# EAGLE board untitled (EAGLE 9.6.2)
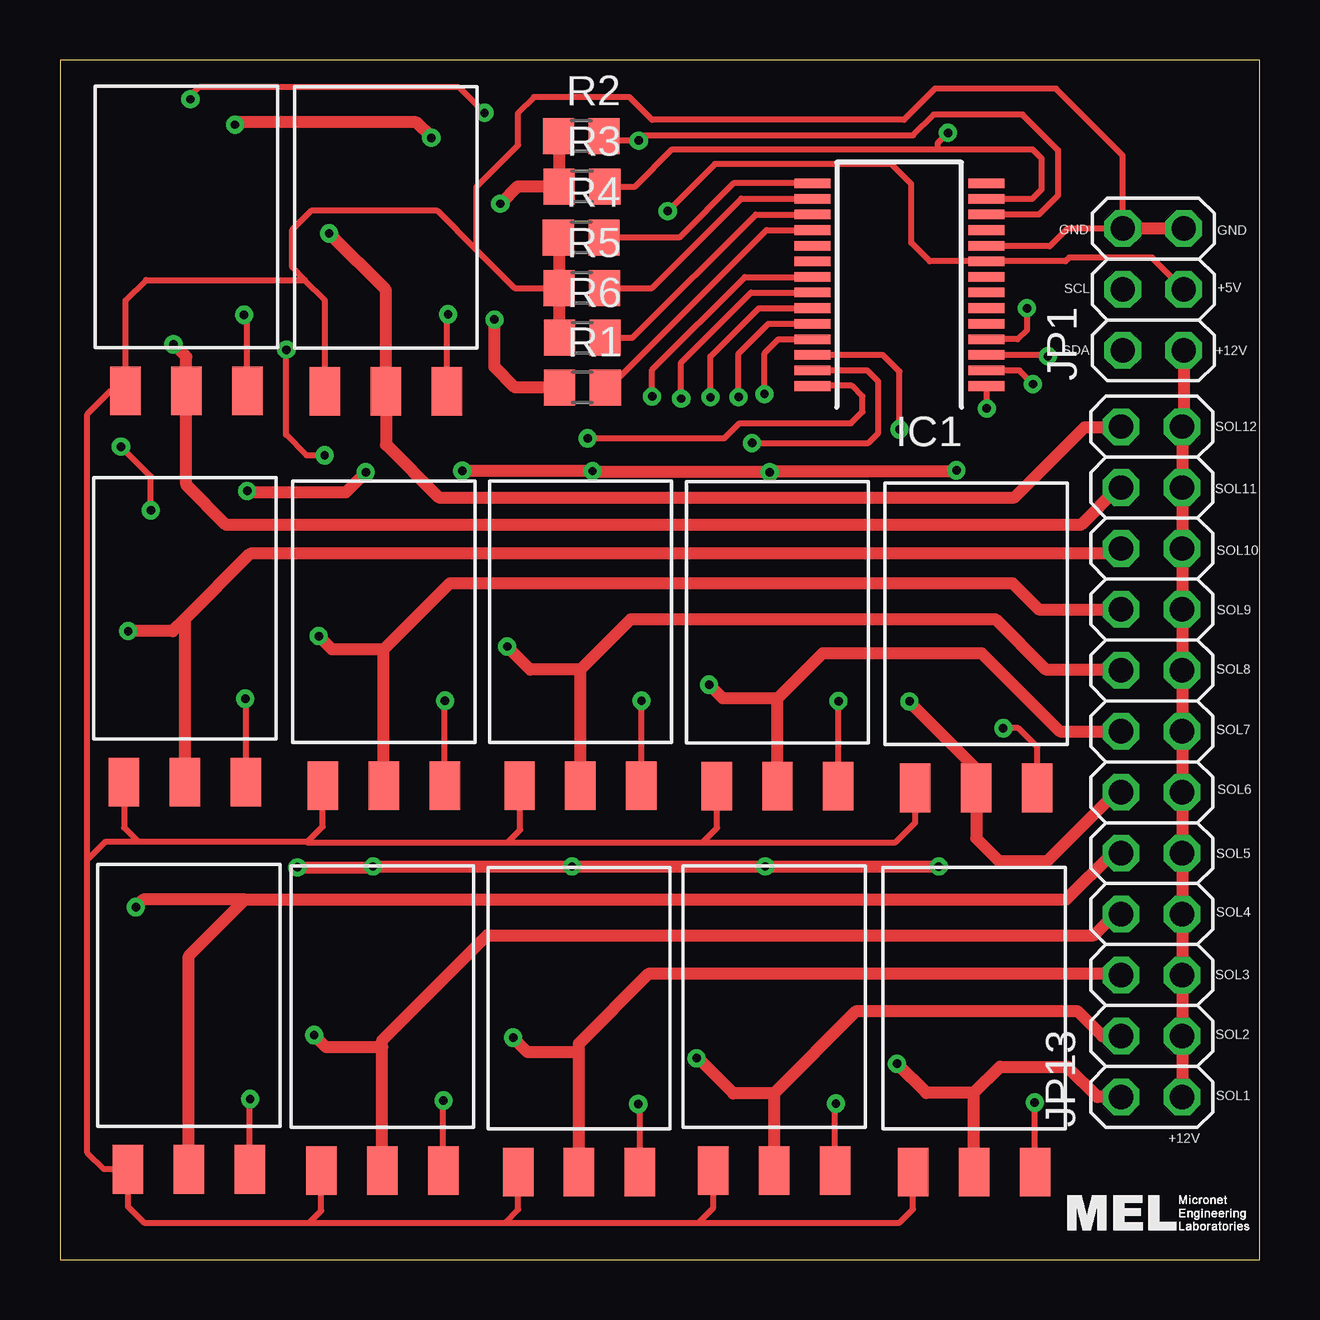
[diagram p0: board, top side]
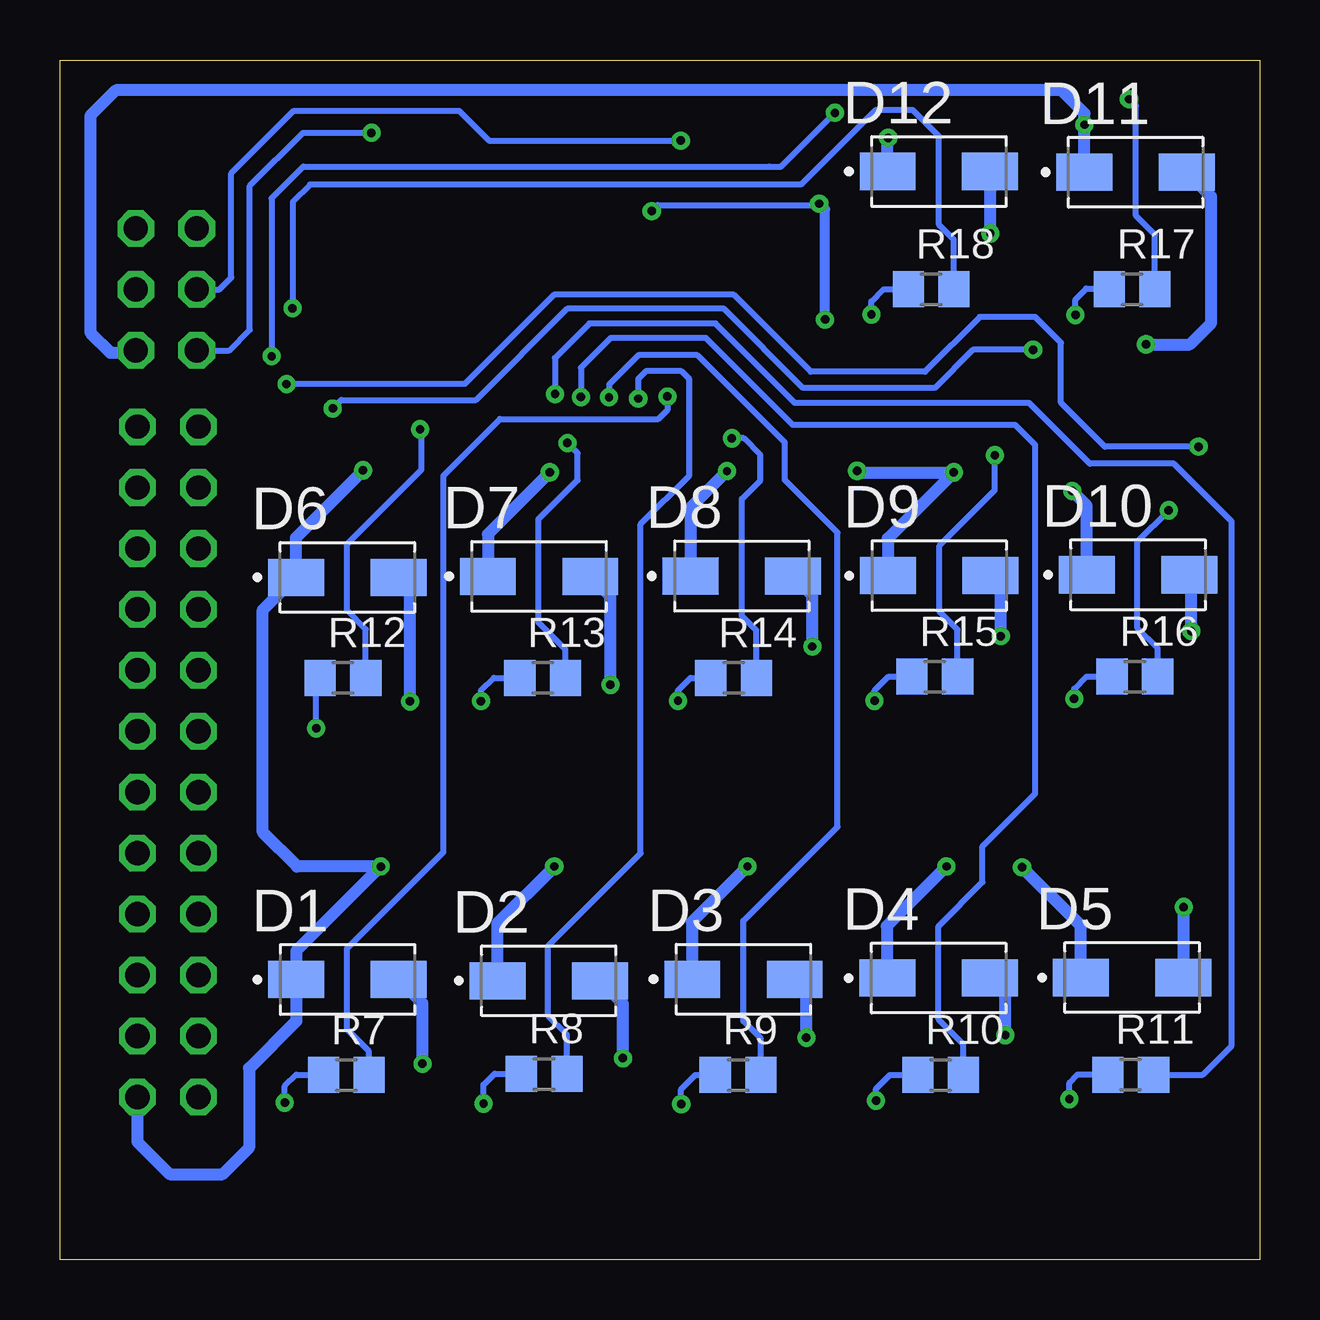
[diagram p1: board, bottom side, seen from below]

Size 50 x 50 mm. Coordinates in mm from the lower left corner, seen from the top.
Outline: 0,0 50,0 50,50 0,50 0,0
Copper layers (1*16): Top 0.035mm / dielectric 1.5mm / Bottom 0.035mm
Design rules "default": minimum track width 6mil, minimum drill 0.35mm, track to track 6mil, track to pad 6mil, pad to pad 6mil, via to via 6mil, smd to smd 6mil, copper to edge 40mil, drill to drill 6mil, minimum pad ring 10mil, minimum via ring 8mil, stop-mask expansion 4mil, vias tented up to drill 0mil, thermal gap 10mil

## Footprints (pad centres in the part's own frame; a part is rotated, then mirrored left to right if it is on the bottom)
BD677-SMD = smd 1.27 x 2.032: BASE 2.54,0; COL 0,0; EMI -2.54,0
DIOM5226X240N = smd 2.33 x 1.55: A 2.135,0; C -2.135,0
SSOP28 = smd 0.4 x 1.5: 1 -4.225,-3.625; 2 -3.575,-3.625; 3 -2.925,-3.625; 4 -2.275,-3.625; 5 -1.625,-3.625; 6 -0.975,-3.625; 7 -0.325,-3.625; 8 0.325,-3.625; 9 0.975,-3.625; 10 1.625,-3.625; 11 2.275,-3.625; 12 2.925,-3.625; 13 3.575,-3.625; 14 4.225,-3.625; 15 4.225,3.625; 16 3.575,3.625; 17 2.925,3.625; 18 2.275,3.625; 19 1.625,3.625; 20 0.975,3.625; 21 0.325,3.625; 22 -0.325,3.625; 23 -0.975,3.625; 24 -1.625,3.625; 25 -2.275,3.625; 26 -2.925,3.625; 27 -3.575,3.625; 28 -4.225,3.625
2X03 = drill 1.016 octagon: 1 -2.54,-1.27; 2 -2.54,1.27; 3 0,-1.27; 4 0,1.27; 5 2.54,-1.27; 6 2.54,1.27
2X12 = drill 1.016 octagon: 1 -13.97,-1.27; 2 -13.97,1.27; 3 -11.43,-1.27; 4 -11.43,1.27; 5 -8.89,-1.27; 6 -8.89,1.27; 7 -6.35,-1.27; 8 -6.35,1.27; 9 -3.81,-1.27; 10 -3.81,1.27; 11 -1.27,-1.27; 12 -1.27,1.27; 13 1.27,-1.27; 14 1.27,1.27; 15 3.81,-1.27; 16 3.81,1.27; 17 6.35,-1.27; 18 6.35,1.27; 19 8.89,-1.27; 20 8.89,1.27; 21 11.43,-1.27; 22 11.43,1.27; 23 13.97,-1.27; 24 13.97,1.27
R0805 = smd 1.3 x 1.5: 1 -0.95,0; 2 0.95,0

## Placement (x,y rotation side)
BD677-SMD1  [BD677-SMD]  38.1,3.64 0 top
BD677-SMD2  [BD677-SMD]  29.77,3.7 0 top
BD677-SMD3  [BD677-SMD]  21.63,3.64 0 top
BD677-SMD4  [BD677-SMD]  13.43,3.7 0 top
BD677-SMD5  [BD677-SMD]  5.37,3.76 0 top
BD677-SMD6  [BD677-SMD]  38.19,19.66 0 top
BD677-SMD7  [BD677-SMD]  29.91,19.73 0 top
BD677-SMD8  [BD677-SMD]  21.7,19.75 0 top
BD677-SMD9  [BD677-SMD]  13.5,19.75 0 top
BD677-SMD10  [BD677-SMD]  5.21,19.9 0 top
BD677-SMD11  [BD677-SMD]  5.27,36.21 0 top
BD677-SMD12  [BD677-SMD]  13.59,36.19 0 top
D1  US1M-13  [DIOM5226X240N]  38.01,11.67 0 bottom
D2  US1M-13  [DIOM5226X240N]  29.63,11.62 0 bottom
D3  US1M-13  [DIOM5226X240N]  21.51,11.68 0 bottom
D4  US1M-13  [DIOM5226X240N]  13.37,11.74 0 bottom
D5  US1M-13  [DIOM5226X240N]  5.31,11.75 0 bottom
D6  US1M-13  [DIOM5226X240N]  38.02,28.43 0 bottom
D7  US1M-13  [DIOM5226X240N]  30.03,28.47 0 bottom
D8  US1M-13  [DIOM5226X240N]  21.58,28.49 0 bottom
D9  US1M-13  [DIOM5226X240N]  13.35,28.51 0 bottom
D10  US1M-13  [DIOM5226X240N]  5.06,28.54 0 bottom
D11  US1M-13  [DIOM5226X240N]  5.16,45.32 0 bottom
D12  US1M-13  [DIOM5226X240N]  13.37,45.35 0 bottom
IC1  MCP23017SS  [SSOP28]  34.98,40.63 90 top
JP1  [2X03]  45.57,40.44 90 top
JP13  [2X12]  45.51,20.75 90 top
R1  [R0805]  21.78,36.35 0 top
R2  [R0805]  21.73,46.83 0 top
R3  [R0805]  21.76,44.72 0 top
R4  [R0805]  21.72,42.6 0 top
R5  [R0805]  21.75,40.5 0 top
R6  [R0805]  21.77,38.42 0 top
R7  [R0805]  38.06,7.69 0 bottom
R8  [R0805]  29.82,7.73 0 bottom
R9  [R0805]  21.73,7.69 0 bottom
R10  [R0805]  13.29,7.7 0 bottom
R11  [R0805]  5.37,7.71 0 bottom
R12  [R0805]  38.2,24.24 0 bottom
R13  [R0805]  29.88,24.25 0 bottom
R14  [R0805]  21.92,24.24 0 bottom
R15  [R0805]  13.54,24.29 0 bottom
R16  [R0805]  5.2,24.3 0 bottom
R17  [R0805]  5.31,40.44 0 bottom
R18  [R0805]  13.69,40.44 0 bottom

## Library data of the parts
BD677-SMD1-BD677-SMD12 = BD677-SMD
D1-D12 = US1M-13; AVAILABILITY: In Stock; DESCRIPTION: Diode Standard 1000 V 1A Surface Mount SMA; MF: Diodes Incorporated; MP: US1M-13; PACKAGE: DO-214AC-214 Diodes Incorporated; PRICE: None; PURCHASE-URL: https://pricing.snapeda.com/search/part/US1M-13/?ref=eda
IC1 = adafruit
JP1 JP13 = pinhead
R1-R18 = rcl; SPICEPREFIX: R

## Nets
+12V: D1.C D2.C D3.C D4.C D5.C D6.C D7.C D8.C D9.C D10.C D11.C D12.C JP1.1 JP13.1 JP13.3 JP13.5 JP13.7 JP13.9 JP13.11 JP13.13 JP13.15 JP13.17 JP13.19 JP13.21 JP13.23
A0: IC1.21 R7.2
A1: IC1.22 R8.2
A2: IC1.23 R9.2
A3: IC1.24 R10.2
A4: IC1.25 R11.2
A5: IC1.26 R12.2
A6: IC1.27 R13.2
A7: IC1.28 R14.2
A8: IC1.1 R15.2
A9: IC1.2 R16.2
A10: IC1.3 R17.2
A11: IC1.4 R18.2
GND: BD677-SMD1.EMI BD677-SMD2.EMI BD677-SMD3.EMI BD677-SMD4.EMI BD677-SMD5.EMI BD677-SMD6.EMI BD677-SMD7.EMI BD677-SMD8.EMI BD677-SMD9.EMI BD677-SMD10.EMI BD677-SMD11.EMI BD677-SMD12.EMI IC1.10 JP1.5 JP1.6 R4.1 R5.1 R6.1
N$1: IC1.18 R1.2
N$2: BD677-SMD1.BASE R7.1
N$3: BD677-SMD2.BASE R8.1
N$4: IC1.15 R4.2
N$5: IC1.16 R5.2
N$6: IC1.17 R6.2
N$7: BD677-SMD3.BASE R9.1
N$8: BD677-SMD6.BASE R12.1
N$9: BD677-SMD7.BASE R13.1
N$10: BD677-SMD8.BASE R14.1
N$11: BD677-SMD4.BASE R10.1
N$12: BD677-SMD5.BASE R11.1
N$13: BD677-SMD9.BASE R15.1
N$14: BD677-SMD10.BASE R16.1
N$21: BD677-SMD11.BASE R17.1
N$22: BD677-SMD12.BASE R18.1
SCL: IC1.12 JP1.4 R2.2
SDA: IC1.13 JP1.2 R3.2
SOLE1: BD677-SMD1.COL D1.A JP13.2
SOLE2: BD677-SMD2.COL D2.A JP13.4
SOLE3: BD677-SMD3.COL D3.A JP13.6
SOLE4: BD677-SMD4.COL D4.A JP13.8
SOLE5: BD677-SMD5.COL D5.A JP13.10
SOLE6: BD677-SMD6.COL D6.A JP13.12
SOLE7: BD677-SMD7.COL D7.A JP13.14
SOLE8: BD677-SMD8.COL D8.A JP13.16
SOLE9: BD677-SMD9.COL D9.A JP13.18
SOLE10: BD677-SMD10.COL D10.A JP13.20
SOLE11: BD677-SMD11.COL D11.A JP13.22
SOLE12: BD677-SMD12.COL D12.A JP13.24
VCC: IC1.9 JP1.3 R1.1 R2.1 R3.1

## Tracks (layer width: path | path; a pad name or v marks a point on that pad's centre or on a via)
+12V  (via drill 0.35)
  Top 0.508: JP1.1 46.84,34.78 JP13.23 JP13.21 JP13.19 JP13.17 JP13.15 JP13.13 JP13.11 JP13.9 JP13.7 JP13.5 JP13.3 JP13.1 | v9.9,16.35 13.01,16.35 13.07,16.41 13.07,16.4 v13.05,16.39 v21.34,16.39 v29.39,16.39 | 29.41,16.39 v29.39,16.39 | 29.41,16.39 | v29.39,16.39 29.41,16.39 | v29.39,16.39 | v29.39,16.39 36.62,16.39 36.64,16.36 v36.64,16.37 v36.63,16.38 | v37.37,32.89 37.32,32.84 29.61,32.84 v29.58,32.81 22.25,32.81 v22.2,32.87 16.78,32.87 v16.77,32.88 | v7.81,32.03 7.87,31.98 11.91,31.98 v12.74,32.81 | v15.48,46.75 15.48,46.77 14.85,47.4 7.26,47.4 7.26,47.32 7.28,47.3 v7.3,47.3
  Bottom 0.508: D5.C 7.45,13.9 v9.9,16.35 | v13.05,16.39 15.54,13.9 15.54,11.76 D4.C | v21.34,16.39 23.67,14.07 23.67,11.7 D3.C | v29.39,16.39 31.78,14 D2.C | D10.C 7.2,31.43 v7.81,32.03 | D9.C 15.49,30.06 v12.74,32.81 16.7,32.81 v16.77,32.88 | v22.2,32.87 23.73,31.33 23.73,28.5 D8.C | D7.C 32.16,30.23 v29.58,32.81 | v37.37,32.89 40.18,30.08 40.18,28.45 | 40.18,28.45 D6.C | D11.C v7.3,47.3 7.3,47.77 8.26,48.73 47.67,48.73 48.73,47.67 48.73,38.64 47.89,37.8 46.94,37.8 JP1.1 | 40.18,28.45 41.55,27.08 41.55,17.81 40.12,16.38 v36.63,16.38 40.15,12.86 D1.C 40.15,9.95 42.12,7.98 42.12,4.66 43.22,3.56 45.42,3.56 46.78,4.91 JP13.1 | D12.C 15.5,46.74 v15.48,46.75
A0  (via drill 0.35)
  Top 0.254: v24.68,35.97 24.68,37.09 28.54,40.95 IC1.21
  Bottom 0.254: R7.2 37.12,8.67 38.04,9.59 38.04,12.96 34.02,16.98 34.02,32.67 31.66,35.03 25.05,35.03 24.68,35.4 v24.68,35.97
A1  (via drill 0.35)
  Top 0.254: v25.89,35.89 25.89,37.4 28.8,40.3 IC1.22
  Bottom 0.254: R8.2 28.87,9.38 29.65,10.16 29.65,13.07 25.8,16.93 25.8,30.65 23.77,32.68 23.77,36.69 24.1,37.03 25.58,37.03 25.89,36.71 v25.89,35.89
A2  (via drill 0.35)
  Top 0.254: v27.11,35.94 27.11,37.64 29.13,39.66 IC1.23
  Bottom 0.254: R9.2 20.78,9.22 21.51,9.94 21.51,14.12 17.59,18.04 17.59,30.3 19.79,32.49 19.79,34.05 23.43,37.69 25.89,37.69 27.11,36.47 v27.11,35.94
A3  (via drill 0.35)
  Top 0.254: v28.29,35.95 28.29,37.77 29.52,39.01 IC1.24
  Bottom 0.254: R10.2 12.34,8.98 13.38,10.02 13.38,13.9 11.55,15.73 11.55,17.23 9.35,19.42 9.35,33.95 10.19,34.79 19.45,34.79 23.08,38.41 27.04,38.41 28.29,37.17 v28.29,35.95
A4  (via drill 0.35)
  Top 0.254: v29.36,36.08 29.36,37.77 29.95,38.35 IC1.25
  Bottom 0.254: R11.2 2.37,7.71 1.17,8.91 1.17,30.77 3.57,33.17 7.07,33.17 9.6,35.7 19.37,35.7 22.68,39.01 27.93,39.01 29.36,37.58 v29.36,36.08
A5  (via drill 0.35)
  Top 0.254: v34.99,34.6 34.99,37.01 34.3,37.7 IC1.26
  Bottom 0.254: R12.2 37.25,26.27 38.04,27.05 38.04,29.81 34.93,32.92 34.93,34.52 34.99,34.58 v34.99,34.6
A6  (via drill 0.35)
  Top 0.254: v28.85,34.04 33.69,34.04 34.11,34.45 34.11,36.6 33.65,37.05 IC1.27
  Bottom 0.254: R13.2 28.93,25.43 30.05,26.55 30.05,30.86 28.42,32.49 28.42,33.61 v28.85,34.04
A7  (via drill 0.35)
  Top 0.254: v21.99,34.23 27.69,34.23 28.32,34.86 32.98,34.86 33.45,35.34 33.45,35.97 33.01,36.42 31.37,36.42 IC1.28
  Bottom 0.254: R14.2 20.97,26.23 21.57,26.83 21.57,31.7 20.8,32.47 20.8,33.54 21.49,34.23 v21.99,34.23
A8  (via drill 0.35)
  Top 0.254: v11.03,33.52 10.27,33.52 9.42,34.38 9.42,37.9 v9.44,37.92 | v38.63,35.47 38.63,36.38 IC1.1
  Bottom 0.254: R15.2 12.59,26.25 13.34,27.01 13.34,29.75 11.03,32.06 v11.03,33.52 | v9.44,37.92 11.94,37.92 13.54,36.33 19.02,36.33 22.32,39.63 28.86,39.63 32.67,35.82 38.28,35.82 v38.63,35.47
A9  (via drill 0.35)
  Top 0.254: v3.79,31.23 3.79,32.64 v2.54,33.88 | v40.56,36.49 39.99,37.05 IC1.2
  Bottom 0.254: R16.2 4.25,25.48 5.08,26.32 5.08,29.93 v3.79,31.23 | v2.54,33.88 6.45,33.88 8.28,35.72 8.28,38.21 9.35,39.28 11.66,39.28 13.94,37 18.7,37 21.91,40.21 29.41,40.21 33.13,36.49 v40.56,36.49
A10  (via drill 0.35)
  Top 0.254: v41.18,37.65 41.12,37.7 IC1.3 | v5.44,48.36 5.44,48.51 5.79,48.86 16.64,48.86 v17.7,47.8
  Bottom 0.254: R17.2 4.36,42.71 5.15,43.5 5.15,48.08 v5.44,48.36 | v41.18,37.65 v41.18,37.66 41.18,44.23 39.86,45.55 20.45,45.55 19.95,45.55 v17.7,47.8
A11  (via drill 0.35)
  Top 0.254: IC1.4 39.91,38.35 40.31,38.75 v40.31,39.65
  Bottom 0.254: R18.2 12.74,42.51 13.36,43.13 13.36,46.82 14.46,47.91 16.01,47.91 19.12,44.81 39.58,44.81 40.3,44.09 40.3,39.86 40.31,39.85 v40.31,39.65
GND
  Top 0.254: 10.39,1.53 3.5,1.53 2.83,2.21 BD677-SMD5.EMI 1.83,3.76 1.14,4.45 1.14,16.66 | BD677-SMD4.EMI 10.89,2.04 10.39,1.53 | 10.39,1.53 18.54,1.53 | BD677-SMD3.EMI 19.09,2.09 18.54,1.53 | 18.54,1.53 26.61,1.53 | BD677-SMD2.EMI 27.23,2.16 26.61,1.53 | 26.61,1.53 34.99,1.53 35.56,2.1 BD677-SMD1.EMI | BD677-SMD10.EMI 2.67,18 3.26,17.42 3.6,17.42 | 3.6,17.42 10.33,17.42 | BD677-SMD9.EMI 10.96,18.05 10.33,17.42 | 10.33,17.42 10.3,17.39 18.67,17.39 | 18.67,17.39 19.18,17.91 19.18,19.72 BD677-SMD8.EMI | 18.67,17.39 26.79,17.39 | 26.79,17.39 27.39,18 27.39,19.7 BD677-SMD7.EMI | 26.79,17.39 34.83,17.39 35.65,18.21 BD677-SMD6.EMI | 1.14,16.66 1.91,17.43 3.59,17.43 3.6,17.42 | BD677-SMD12.EMI 11.05,39.99 10.21,40.83 | 10.21,40.83 3.58,40.83 2.73,39.98 BD677-SMD11.EMI 2.12,36.21 1.14,35.24 1.14,16.66 | 10.21,40.83 9.68,41.36 9.68,42.92 10.47,43.71 15.73,43.71 17.36,42.08 | R5.1 18.94,40.5 17.36,42.08 | IC1.10 38.63,42.23 41.26,42.23 42,42.98 JP1.6 44.3,46.02 41.52,48.8 36.47,48.8 35.18,47.51 24.68,47.51 23.74,48.46 19.76,48.46 19.1,47.8 19.1,46.45 17.36,44.71 17.36,42.08
  Top 0.508: R4.1 20.8,42.57 R5.1 20.82,40.48 R6.1 | JP1.5 JP1.6
N$1
  Top 0.254: R1.2 22.89,36.35 29.45,42.91 IC1.18
N$2  (via drill 0.35)
  Top 0.254: BD677-SMD1.BASE v40.64,6.54 v40.63,6.54
  Bottom 0.254: v40.63,6.54 40.63,7.23 40.16,7.71 39.03,7.71 R7.1
N$3  (via drill 0.35)
  Top 0.254: BD677-SMD2.BASE 32.31,6.47 v32.34,6.5
  Bottom 0.254: v32.34,6.5 32.34,7.28 31.89,7.74 30.78,7.74 R8.1
N$4
  Top 0.254: IC1.15 28.07,44.85 25.82,42.6 R4.2
N$5
  Top 0.254: R5.2 24.68,40.5 28.4,44.22 31.34,44.22 IC1.16
N$6
  Top 0.254: R6.2 23.86,38.42 29,43.56 IC1.17
N$7  (via drill 0.35)
  Top 0.254: BD677-SMD3.BASE 24.17,6.49 24.15,6.52 v24.11,6.48
  Bottom 0.254: v24.11,6.48 24.11,7.1 23.51,7.69 R9.1
N$8  (via drill 0.35)
  Top 0.254: BD677-SMD6.BASE 40.73,21.36 39.94,22.15 v39.32,22.15
  Bottom 0.254: v39.32,22.15 39.32,24.24 R12.1
N$9  (via drill 0.35)
  Top 0.254: BD677-SMD7.BASE v32.45,23.27 v32.45,23.28
  Bottom 0.254: v32.45,23.28 32.45,23.71 31.91,24.25 R13.1
N$10  (via drill 0.35)
  Top 0.254: BD677-SMD8.BASE v24.24,23.29
  Bottom 0.254: v24.24,23.29 24.24,23.71 23.71,24.24 R14.1
N$11  (via drill 0.35)
  Top 0.254: BD677-SMD4.BASE 15.97,6.61 v15.99,6.63
  Bottom 0.254: v15.99,6.63 15.99,7.12 15.41,7.7 R10.1
N$12  (via drill 0.35)
  Top 0.254: BD677-SMD5.BASE 7.91,6.67 v7.93,6.68
  Bottom 0.254: v7.93,6.68 7.93,7.37 7.58,7.71 R11.1
N$13  (via drill 0.35)
  Top 0.254: BD677-SMD9.BASE v16.04,23.28 v16.05,23.29
  Bottom 0.254: v16.05,23.29 16.05,23.71 15.46,24.29 R15.1
N$14  (via drill 0.35)
  Top 0.254: BD677-SMD10.BASE 7.75,23.28 7.69,23.34 | 7.69,23.34 | 7.69,23.34 v7.73,23.37
  Bottom 0.254: v7.73,23.37 7.73,23.79 7.21,24.3 R16.1
N$21  (via drill 0.35)
  Top 0.254: BD677-SMD11.BASE 7.81,39.31 7.72,39.4 7.7,39.4 v7.67,39.38
  Bottom 0.254: R17.1 6.29,40.47 7.22,40.47 7.67,40.02 v7.67,39.38
N$22  (via drill 0.35)
  Top 0.254: BD677-SMD12.BASE 16.13,39.35 v16.18,39.4
  Bottom 0.254: v16.18,39.4 16.18,39.94 15.67,40.44 R18.1
SCL  (via drill 0.35)
  Top 0.254: R2.2 22.89,47.03 23.27,46.64 v24.12,46.64 24.34,46.86 35.56,46.86 36.42,47.73 40.12,47.73 41.6,46.25 41.6,44.35 40.81,43.55 IC1.12
  Bottom 0.254: JP1.4 43.36,40.44 42.86,40.93 42.86,45.27 40.25,47.88 33.36,47.88 32.12,46.64 v24.12,46.64
SDA  (via drill 0.35)
  Top 0.254: R3.2 23.97,44.72 25.52,46.27 36.58,46.27 | 36.58,46.27 40.54,46.27 40.91,45.9 40.91,44.6 40.51,44.2 IC1.13 | v37.01,46.97 36.58,46.53 36.58,46.27
  Bottom 0.254: JP1.2 42.94,37.9 42.09,38.75 42.09,44.75 39.87,46.97 v37.01,46.97
SOLE1  (via drill 0.35)
  Top 0.508: BD677-SMD1.COL 38.1,6.95 | 38.1,6.95 39.19,8.04 42,8.04 43.26,6.78 JP13.2 | 38.1,6.95 36.11,6.95 v34.89,8.16
  Bottom 0.508: v34.89,8.16 34.89,10.69 D1.A
SOLE2  (via drill 0.35)
  Top 0.508: BD677-SMD2.COL 29.77,6.92 | 29.77,6.92 33.2,10.36 42.4,10.36 43.44,9.32 JP13.4 | 29.77,6.92 28.07,6.92 26.57,8.43 v26.54,8.39
  Bottom 0.508: v26.54,8.39 26.54,10.66 D2.A
SOLE3  (via drill 0.35)
  Top 0.508: BD677-SMD3.COL 21.63,8.64 | 21.63,8.64 21.63,9 24.56,11.92 44.17,11.92 JP13.6 | 21.63,8.64 19.5,8.64 v18.89,9.25
  Bottom 0.508: v18.89,9.25 18.89,11.2 D3.A
SOLE4  (via drill 0.35)
  Top 0.508: BD677-SMD4.COL 13.44,8.85 | 13.44,8.85 13.44,9.14 17.8,13.51 43.1,13.51 43.98,14.4 JP13.8 | 13.44,8.85 11.1,8.85 v10.6,9.35
  Bottom 0.508: v10.6,9.35 10.6,11.09 D4.A
SOLE5  (via drill 0.35)
  Top 0.508: BD677-SMD5.COL 5.37,12.65 7.73,15 | 7.73,15 41.95,15 43.88,16.94 JP13.10 | 7.73,15 3.48,15 v3.16,14.69
  Bottom 0.508: v3.16,14.69 3.18,14.68 D5.A
SOLE6  (via drill 0.35)
  Top 0.508: JP13.12 44.02,19.48 41.16,16.62 39.13,16.62 38.19,17.55 BD677-SMD6.COL 38.19,20.45 35.4,23.25 v35.41,23.27
  Bottom 0.508: v35.41,23.27 35.41,27.96 D6.A
SOLE7  (via drill 0.35)
  Top 0.508: BD677-SMD7.COL 29.91,23.39 | 29.91,23.39 31.8,25.28 38.42,25.28 41.68,22.02 JP13.14 | 29.91,23.39 27.63,23.39 v27.06,23.96
  Bottom 0.508: v27.06,23.96 27.06,27.64 D7.A
SOLE8  (via drill 0.35)
  Top 0.508: BD677-SMD8.COL 21.7,24.59 | 21.7,24.59 23.8,26.69 38.99,26.69 41.08,24.6 44.19,24.6 JP13.16 | 21.7,24.59 19.6,24.59 v18.64,25.55
  Bottom 0.508: v18.64,25.55 18.64,27.68 D8.A
SOLE9  (via drill 0.35)
  Top 0.508: BD677-SMD9.COL 13.5,25.43 | 13.5,25.43 16.26,28.2 39.7,28.2 40.8,27.1 JP13.18 | 13.5,25.43 11.34,25.43 v10.79,25.98
  Bottom 0.508: v10.79,25.98 10.79,28.07 D9.A
SOLE10  (via drill 0.35)
  Top 0.508: BD677-SMD10.COL 5.21,26.7 | JP13.20 44.02,29.42 7.93,29.42 5.21,26.7 | 5.21,26.7 4.7,26.19 v2.84,26.19
  Bottom 0.508: v2.84,26.19 2.84,28.46 D10.A
SOLE11  (via drill 0.35)
  Top 0.508: JP13.22 44.1,32.18 42.55,30.62 6.94,30.62 5.27,32.29 BD677-SMD11.COL 5.27,37.63 4.75,38.14 v4.73,38.14
  Bottom 0.254: 2.69,44.99 D11.A
  Bottom 0.508: v4.73,38.14 2.91,38.14 2.02,39.04 2.02,44.31 2.69,44.99
SOLE12  (via drill 0.35)
  Top 0.508: 44.33,34.7 44.36,34.67 | JP13.24 44.22,34.7 42.71,34.7 39.78,31.77 15.78,31.77 13.59,33.96 BD677-SMD12.COL 13.59,40.4 v11.22,42.77
  Bottom 0.508: v11.22,42.77 11.22,45.34 D12.A
VCC  (via drill 0.35)
  Top 0.254: JP1.3 45.52,41.76 42.07,41.76 41.91,41.6 IC1.9 36.26,41.6 35.48,42.38 35.48,44.83 34.65,45.66 27.3,45.66 v25.34,43.7
  Top 0.508: R2.1 20.81,46.8 R3.1 20.79,44.74 19.08,44.74 v18.36,44.01 | R1.1 18.97,36.35 18.11,37.22 v18.11,39.18
  Bottom 0.254: v25.34,43.7 25.09,43.95 18.42,43.95 v18.36,44.01
  Bottom 0.406: v18.11,39.18 18.11,43.76 v18.36,44.01

## Text on the board
tPlace: GND | GND | SCL | +5V | SDA | +12V | SOL12 | SOL11 | SOL10 | SOL9 | SOL8 | SOL7 | SOL6 | SOL5 | SOL4 | SOL3 | SOL2 | SOL1 | +12V